# EAGLE board ecu (EAGLE 8.5.1)
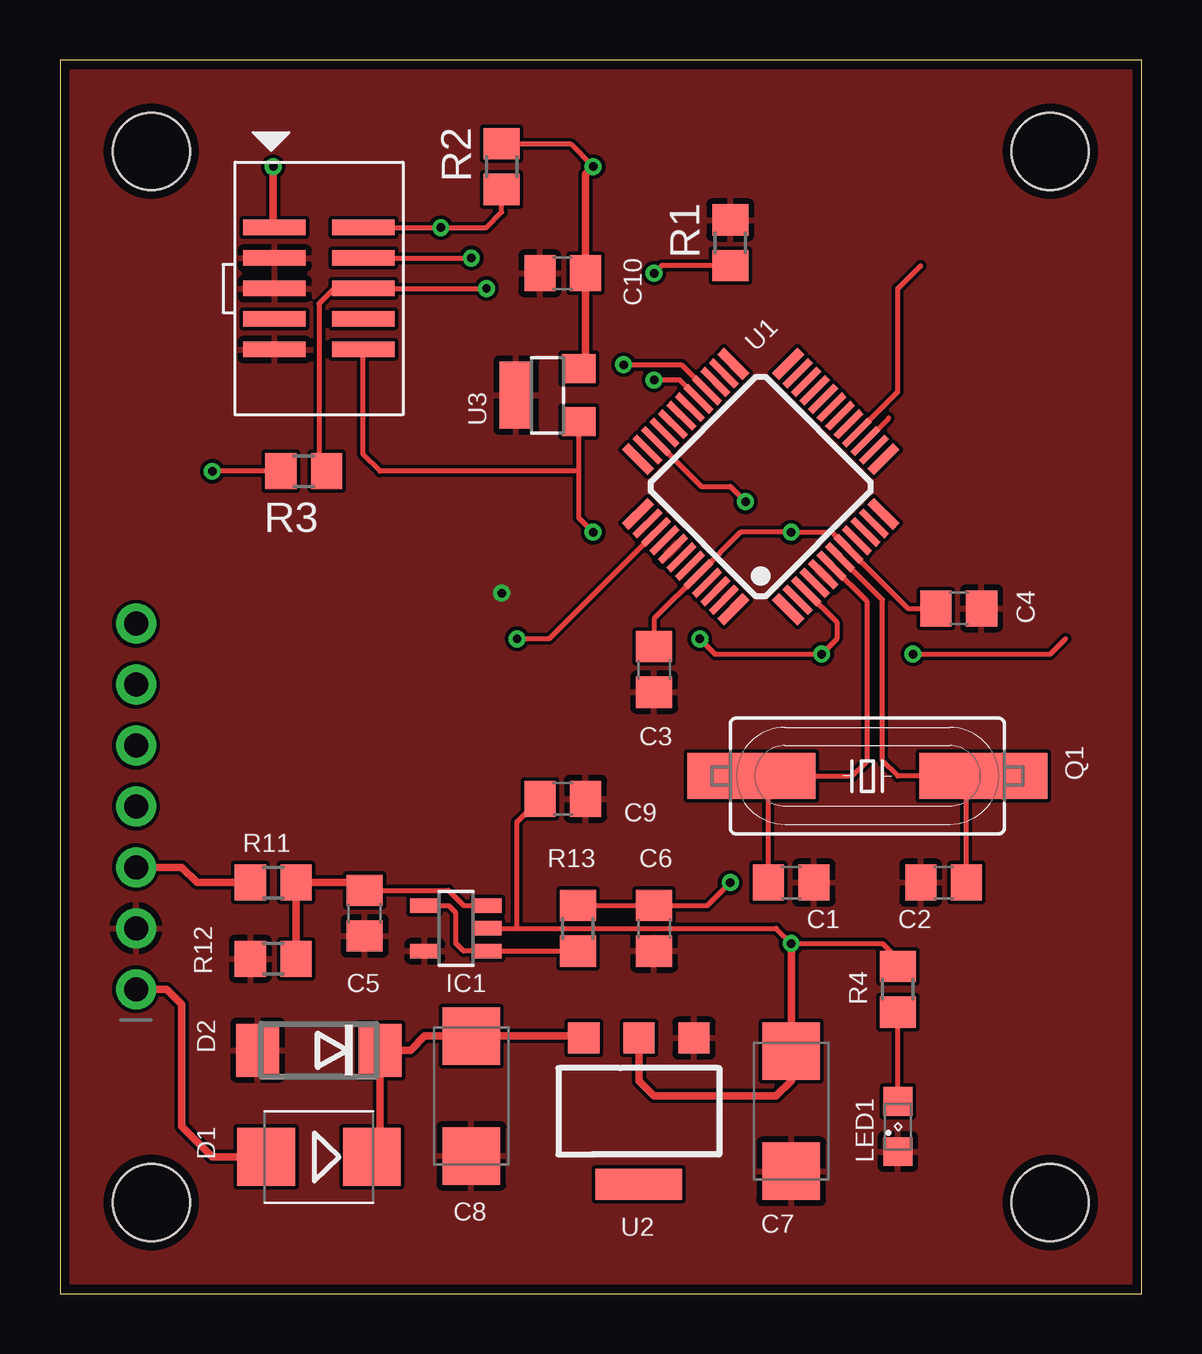
[diagram p0: board, top side]
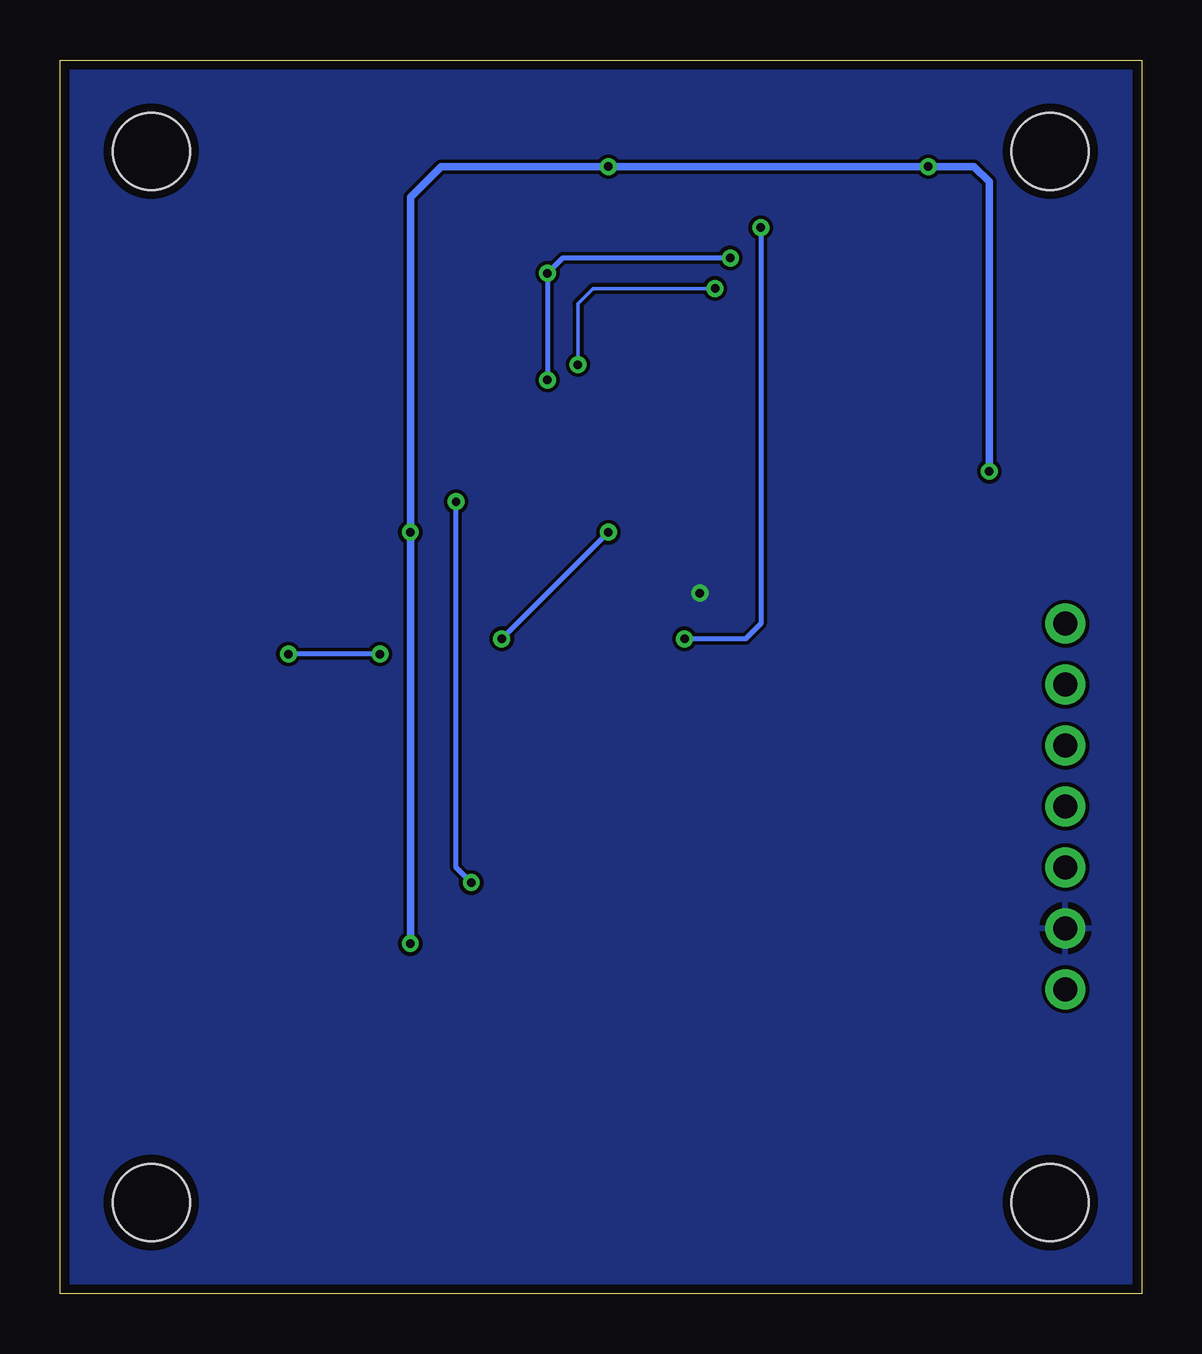
[diagram p1: board, bottom side, seen from below]

Size 45.09 x 51.44 mm. Coordinates in mm from the lower left corner, seen from the top.
Outline: 0,0 45.09,0 45.09,51.44 0,51.44 0,0
Copper layers (1*16): Top 0.0356mm / dielectric 1.5011mm / Bottom 0.0356mm
Design rules "oshpark": minimum track width 6mil, minimum drill 13mil, track to track 6mil, track to pad 6mil, pad to pad 6mil, via to via 6mil, smd to smd 6mil, copper to edge 15mil, drill to drill 6mil, minimum pad ring 7mil, minimum via ring 7mil, stop-mask expansion 3mil, vias tented up to drill 0mil, thermal gap 10mil
Holes 3.2 mm at 3.81,3.81 41.27,3.81 3.81,47.62 41.27,47.62

## Footprints (pad centres in the part's own frame; a part is rotated, then mirrored left to right if it is on the bottom)
C0805 = smd 1.3 x 1.5: 1 -0.95,0; 2 0.95,0
SMC_C = smd 2.4 x 2.4: + -2.5,0; - 2.5,0
SMB = smd 2.4 x 2.4: A 2.2,0; C -2.2,0
DO214AA = smd 1.8 x 2.2: A 2.55,0; C -2.55,0
SOT23-5 = smd 0.6 x 1.2: 1 -0.95,-1.306; 2 0,-1.306; 3 0.95,-1.306; 4 0.95,1.306; 5 -0.95,1.306
1X07_ROUND = drill 1 pad 1.676: 1 -7.62,0; 2 -5.08,0; 3 -2.54,0; 4 0,0; 5 2.54,0; 6 5.08,0; 7 7.62,0
2X05_1.27MM_SMT = smd 0.65 x 2.6: 1 -2.54,-1.85; 2 -2.54,1.85; 3 -1.27,-1.85; 4 -1.27,1.85; 5 0,-1.85; 6 0,1.85; 7 1.27,-1.85; 8 1.27,1.85; 9 2.54,-1.85; 10 2.54,1.85
SML0805 = smd 1.2 x 1.2: A 1.05,0; C -1.05,0
HC49UP = smd 5.334 x 1.93: 1 -4.826,0; 2 4.826,0
R0805 = smd 1.3 x 1.5: 1 -0.95,0; 2 0.95,0
SOT313-2 = smd 0.4 x 1.5: 1 -2.81,-4.425; 12 2.81,-4.425; 25 2.81,4.425; 36 -2.81,4.425 | smd 0.28 x 1.5: 2 -2.25,-4.425; 3 -1.75,-4.425; 4 -1.25,-4.425; 5 -0.75,-4.425; 6 -0.25,-4.425; 7 0.25,-4.425; 8 0.75,-4.425; 9 1.25,-4.425; 10 1.75,-4.425; 11 2.25,-4.425; 26 2.25,4.425; 27 1.75,4.425; 28 1.25,4.425; 29 0.75,4.425; 30 0.25,4.425; 31 -0.25,4.425; 32 -0.75,4.425; 33 -1.25,4.425; 34 -1.75,4.425; 35 -2.25,4.425 | smd 1.5 x 0.4: 13 4.425,-2.81; 24 4.425,2.81; 37 -4.425,2.81; 48 -4.425,-2.81 | smd 1.5 x 0.28: 14 4.425,-2.25; 15 4.425,-1.75; 16 4.425,-1.25; 17 4.425,-0.75; 18 4.425,-0.25; 19 4.425,0.25; 20 4.425,0.75; 21 4.425,1.25; 22 4.425,1.75; 23 4.425,2.25; 38 -4.425,2.25; 39 -4.425,1.75; 40 -4.425,1.25; 41 -4.425,0.75; 42 -4.425,0.25; 43 -4.425,-0.25; 44 -4.425,-0.75; 45 -4.425,-1.25; 46 -4.425,-1.75; 47 -4.425,-2.25
SOT223-R = smd 1.3 x 1.3: 1 -2.3,-3.05; 2 0,-3.05; 3 2.3,-3.05 | smd 3.6 x 1.3: 4 0,3.05
SOT23-W = smd 1.2 x 1.4: 1 -1.1,-1.3; 2 1.1,-1.3 | smd 2.8 x 1.4: 3 0,1.3

## Placement (x,y rotation side)
C1  22pF  [C0805]  30.48,17.14 0 top
C2  22pF  [C0805]  36.83,17.14 0 top
C3  100nF  [C0805]  24.77,26.04 270 top
C4  100nF  [C0805]  37.47,28.57 0 top
C5  330pF  [C0805]  12.7,15.88 270 top
C6  10nF  [C0805]  24.77,15.24 270 top
C7  10uF  [SMC_C]  30.48,7.62 270 top
C8  10uF  [SMC_C]  17.14,8.26 270 top
C9  100nF  [C0805]  20.95,20.64 0 top
C10  100nF  [C0805]  20.95,42.55 180 top
D1  [SMB]  10.79,5.71 180 top
D2  P6SMB18CA  [DO214AA]  10.79,10.16 180 top
IC1  MCP601R  [SOT23-5]  16.51,15.24 90 top
JP2  E31  [1X07_ROUND]  3.17,20.32 90 top
JTAG1  SWD  [2X05_1.27MM_SMT]  10.79,41.91 270 top
LED1  Power  [SML0805]  34.92,6.99 90 top
Q1  12MHz  [HC49UP]  33.66,21.59 180 top
R1  10k  [R0805]  27.94,43.81 90 top
R2  10k  [R0805]  18.41,46.99 90 top
R3  10k  [R0805]  10.16,34.29 180 top
R4  56  [R0805]  34.92,12.7 90 top
R11  620k  [R0805]  8.89,17.14 180 top
R12  100k  [R0805]  8.89,13.97 0 top
R13  100  [R0805]  21.59,15.24 90 top
U1  LPC1343FBD48  [SOT313-2]  29.21,33.66 45 top
U2  LM1117-3.3  [SOT223-R]  24.13,7.62 180 top
U3  MCP130T  [SOT23-W]  20.32,37.47 90 top

## Library data of the parts
C1-C8 R11-R13 = rcl
C9 C10 = rcl; SPICEPREFIX: C
D1 = diode
D2 = Heinrich
IC1 = linear
JP2 JTAG1 U2 U3 = microbuilder
LED1 = led
Q1 = crystal; OC_FARNELL: unknown; OC_NEWARK: unknown
R1-R4 = rcl; SPICEPREFIX: R
U1 = nxp_60_1_1; ADC: 8; FLASH: 32kB; PWR_PROFILES: no; SERIES: LPC1300; SRAM: 8kB; SSP: 1; USB: Device

## Nets
3.3V: C3.1 C4.1 C7.+ C9.1 C10.1 IC1.2 JTAG1.1 R2.2 R3.2 R4.2 U1.8 U1.44 U2.2 U3.2
12V: D1.A JP2.1
/RESET: JTAG1.10 U1.3 U3.1
/SEN: U1.45
ADC: C6.1 R13.2 U1.34
G1: JP2.7
G2: JP2.6
G3: JP2.5
G4: JP2.4
GND: C1.2 C2.1 C3.2 C4.2 C5.2 C6.2 C7.- C8.- C9.2 C10.2 D2.A IC1.5 JP2.2 JTAG1.3 JTAG1.5 JTAG1.9 LED1.C R1.2 R12.1 U1.5 U1.41 U2.1 U3.3
LICHT: JP2.3 R11.2
N$1: C8.+ D1.C D2.C U2.3
N$2: IC1.1 IC1.4 R13.1
N$4: LED1.A R4.1
N$8: C5.1 IC1.3 R11.1 R12.2
RXD: U1.46
SCL: U1.15
SDA: U1.16
SWCLK: JTAG1.4 R1.1 U1.29
SWDIO: JTAG1.2 R2.1 U1.39
SWO: JTAG1.6 R3.1 U1.28
TXD: U1.47
XTALIN: C1.1 Q1.2 U1.6
XTALOUT: C2.2 Q1.1 U1.7

## Tracks (layer width: path | path; a pad name or v marks a point on that pad's centre or on a via)
3.3V  (via drill 0.35)
  Top 0.152: C4.1 36.42,28.65 36.12,28.65 36.12,28.57 | 26.65,30.04 26.67,30.02 U1.44
  Top 0.203: 36.2,28.57 36.12,28.57 35.35,28.57 U1.8 32.28,31.64 32.18,31.75 v30.48,31.75 28.37,31.75 26.65,30.04 U1.44 24.77,28.15 C3.1 | IC1.2 19.05,15.24 | R2.2 21.27,47.94 v22.23,46.99 | C9.1 19.05,19.68 19.05,15.24 | 19.05,15.24 29.84,15.24 v30.48,14.61 34.29,14.61 34.92,13.97 R4.2 | R3.2 v6.35,34.29
  Top 0.305: U2.2 24.13,8.89 24.77,8.26 29.84,8.26 30.48,8.89 C7.+ v30.48,14.61 | v22.23,46.99 21.91,46.67 C10.1 21.91,38.85 U3.2 | JTAG1.1 8.89,44.51 v8.89,46.99
  Bottom 0.305: v30.48,14.61 v30.48,31.75 30.48,45.72 29.21,46.99 v22.23,46.99 v8.89,46.99 6.99,46.99 6.35,46.35 v6.35,34.29
12V
  Top 0.305: D1.A 6.35,5.71 5.08,6.99 5.08,12.06 4.45,12.7 JP2.1
/RESET  (via drill 0.35)
  Top 0.203: U1.3 32.38,28 32.38,27.3 v31.75,26.67 27.3,26.67 v26.67,27.3 | U3.1 21.62,34.29 | 21.62,34.29 21.62,32.35 v22.23,31.75 | v35.56,26.67 41.27,26.67 41.91,27.3 | JTAG1.10 12.64,34.98 13.34,34.29 21.62,34.29
  Bottom 0.203: v22.23,31.75 v26.67,27.3 | v31.75,26.67 v35.56,26.67
ADC  (via drill 0.35)
  Top 0.203: R13.2 C6.1 26.98,16.19 v27.94,17.14 | U1.34 26.73,33.66 27.94,33.66 v28.57,33.02
  Bottom 0.203: v27.94,17.14 28.57,17.78 v28.57,33.02
GND  (via drill 0.35)
  other vias: 18.41,29.21
  pour Top: 0,51.44 45.09,51.44 45.09,0 0,0
  pour Bottom: 0,51.44 45.09,51.44 45.09,0 0,0
LICHT
  Top 0.305: JP2.3 5.08,17.78 5.71,17.14 R11.2
N$1
  Top 0.305: D1.C 13.35,6.07 D2.C 14.61,10.16 15.2,10.76 C8.+ 21.75,10.76 U2.3
N$2
  Top 0.203: IC1.4 16.2,16.19 16.51,15.88 16.51,14.61 16.82,14.29 IC1.1 R13.1
N$4
  Top 0.203: LED1.A R4.1
N$8
  Top 0.203: IC1.3 16.83,16.19 16.2,16.82 C5.1
  Top 0.305: R12.2 R11.1 12.38,17.14 C5.1
SCL
  Top 0.203: U1.15 34.55,36.52
SDA
  Top 0.203: U1.16 34.92,37.6 34.92,41.91 35.88,42.86
SWCLK  (via drill 0.35)
  Top 0.203: JTAG1.4 v17.14,43.18 | U1.29 25.83,38.1 v24.77,38.1 | R1.1 25.09,42.87 v24.77,42.55
  Bottom 0.203: v17.14,43.18 24.13,43.18 v24.77,42.55 v24.77,38.1
SWDIO  (via drill 0.35)
  Top 0.203: JTAG1.2 v15.88,44.45 17.78,44.45 18.41,45.09 R2.1 | U1.39 20.39,27.3 v19.05,27.3
  Bottom 0.203: v15.88,44.45 15.88,27.94 16.51,27.3 v19.05,27.3
SWO  (via drill 0.35)
  Top 0.152: 10.79,34.6 R3.1
  Top 0.203: v17.78,41.91 JTAG1.6 11.43,41.91 10.79,41.27 10.79,34.6 | U1.28 25.9,38.73 v23.5,38.73
  Bottom 0.152: v17.78,41.91 22.86,41.91 23.5,41.27 v23.5,38.73
XTALIN
  Top 0.203: U1.6 33.66,28.86 33.66,22.23 33.02,21.59 Q1.2 29.53,20.89 C1.1
XTALOUT
  Top 0.203: U1.7 34.29,28.93 34.29,22.23 34.92,21.59 38.1,21.59 | Q1.1 38.1,21.59 | C2.2 37.78,21.27 38.1,21.59